# EAGLE board sensor_board_v0.56_b (EAGLE 8.2.2)
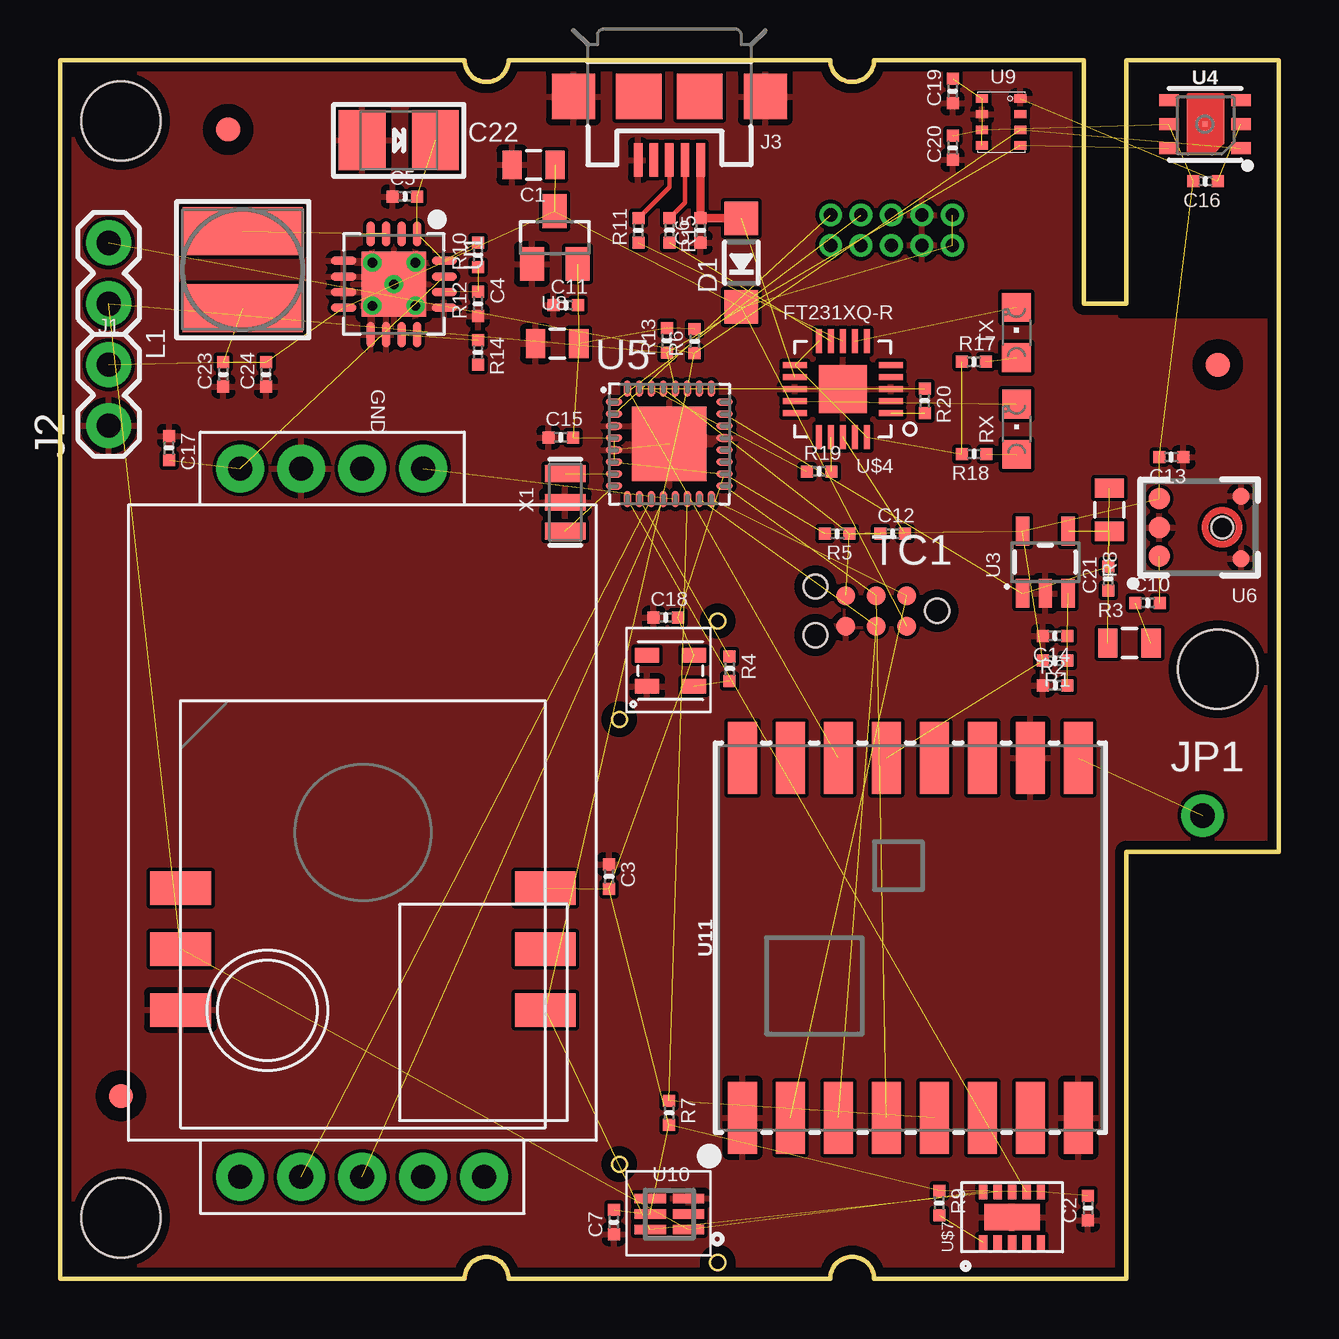
[diagram p0: board, top side]
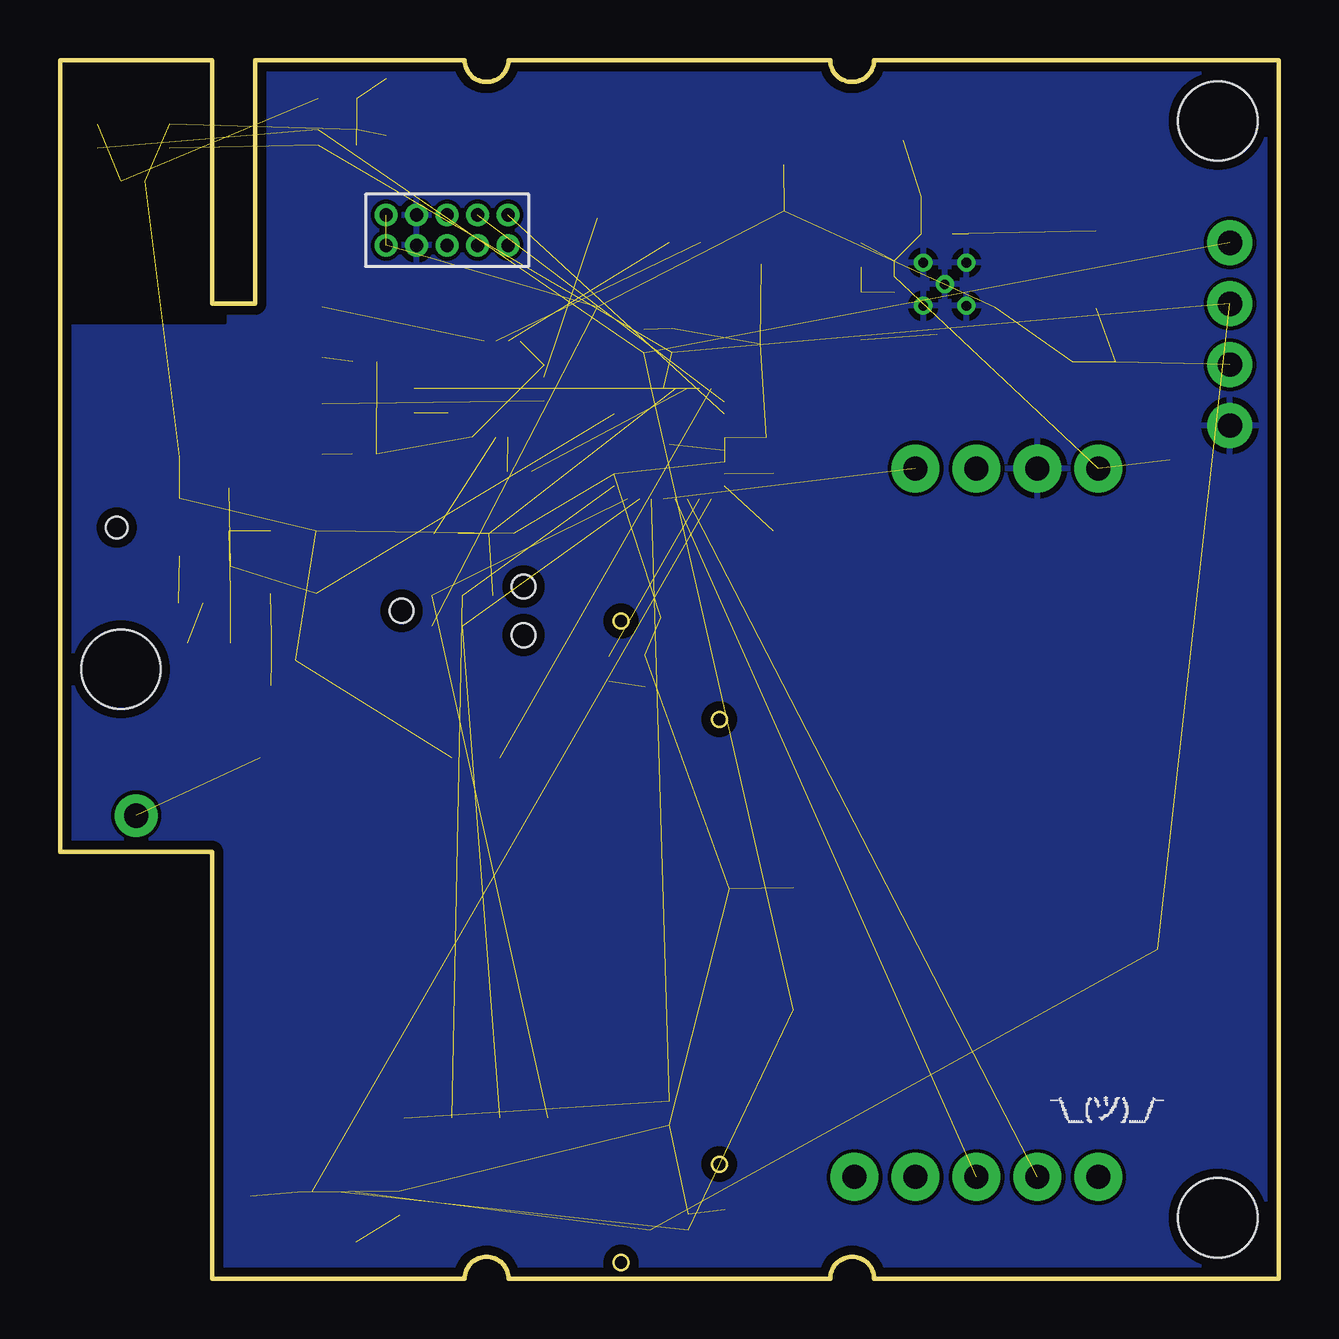
[diagram p1: board, bottom side, seen from below]

Size 50.8 x 50.8 mm. Coordinates in mm from the lower left corner, seen from the top.
Outline: 0,0 16.87,0 arc-90 17.78,0.91 arc-90 18.69,0 32.11,0 arc-90 33.02,0.91 arc-90 33.93,0 44.45,0 44.45,17.78 50.8,17.78 50.8,50.8 44.45,50.8 44.45,40.64 42.67,40.64 42.67,50.8 33.93,50.8 arc-90 33.02,49.89 arc-90 32.11,50.8 18.69,50.8 arc-90 17.78,49.89 arc-90 16.87,50.8 0,50.8 0,0
Copper layers (1*16): Top 0.0356mm / dielectric 1.5011mm / Bottom 0.0356mm
Design rules "oshpark-2layer": minimum track width 6mil, minimum drill 13mil, track to track 6mil, track to pad 6mil, pad to pad 6mil, via to via 6mil, smd to smd 6mil, copper to edge 15mil, drill to drill 6mil, minimum pad ring 7mil, minimum via ring 7mil, stop-mask expansion 2.5mil, vias tented up to drill 0mil, thermal gap 10mil
Net classes: 1 power: width 0.381 mm, clearance 0.254 mm
tRestrict: area 44.2,40.1 to 51.1,51.1
bRestrict: area 43.9,39.9 to 51.3,51.3

## Footprints (pad centres in the part's own frame; a part is rotated, then mirrored left to right if it is on the bottom)
0805 = smd 0.8 x 1.2: 1 -0.9,0; 2 0.9,0
MICROBUILDER__0402MP = smd 0.5 x 0.5: 1 -0.508,0; 2 0.508,0
EIA3528-21/B-R = smd 1.95 x 2.5: + 1.525,0; - -1.525,0
MICROBUILDER_SOD-123 = smd 1.4 x 1.4: A 1.85,0; C -1.85,0
STAND-OFF = hole 3.302: 0,0
1X02 = drill 1.016 pad 1.88: 1 0,0; 2 2.54,0
USB-MICROB = smd 0.35 x 1.4: D+ 0,2.65; D- -0.65,2.65; GND 1.3,2.65; ID 0.65,2.65; VBUS -1.3,2.65 | smd 1.8 x 1.9: MT1 -4,0; MT2 4,0 | smd 1.9 x 1.9: P$1 -1.27,0; P$2 1.27,0
1X01-CLEANBIG = drill 1.016 pad 1.778: 1 0,0
INDUCTOR_5X5MM_TDK_VLC5045 = smd 2 x 5: P$1 -1.6,0; P$2 1.6,0
CHIPLED_0805 = smd 1.2 x 1.2: A 0,-1.05; C 0,1.05
TC2030-IDC-NL = smd 0.787 x 0.787: 1 -1.27,-0.635; 2 -1.27,0.635; 3 0,-0.635; 4 0,0.635; 5 1.27,-0.635; 6 1.27,0.635 | hole 0.991: -2.54,0; 2.54,1.016; 2.54,-1.016
PVQFN-16 = smd 1.05 x 0.35: 1 -2.1,0.975; 2 -2.1,0.325; 3 -2.1,-0.325; 4 -2.1,-0.975; 9 2.1,-0.975; 10 2.1,-0.325; 11 2.1,0.325; 12 2.1,0.975 | smd 0.35 x 1.05: 5 -0.975,-2.1; 6 -0.325,-2.1; 7 0.325,-2.1; 8 0.975,-2.1; 13 0.975,2.1; 14 0.325,2.1; 15 -0.325,2.1; 16 -0.975,2.1 | drill 0.4: P$18 0,0; P$19 -0.9,0.9; P$20 0.9,0.9; P$21 0.9,-0.9; P$22 -0.9,-0.9 | smd 2.7 x 2.7: THERMAL 0,0
SOT23-5 = smd 0.55 x 1.2: 1 -0.95,-1.3; 2 0,-1.3; 3 0.95,-1.3; 4 0.95,1.3; 5 -0.95,1.3
DFN-6-3X3-SI7021 = smd 0.2 x 0.2: 7 0,0 | smd 0.8 x 0.5: DATA 1.5,-1; GND 1.5,0; NC@3 1.5,1; NC@4 -1.5,1; SCK -1.5,-1; VDD -1.5,0
QFN50P500X500X100-33N = smd 0.7 x 0.3: 1 -2.3,1.75; 2 -2.3,1.25; 3 -2.3,0.75; 4 -2.3,0.25; 5 -2.3,-0.25; 6 -2.3,-0.75; 7 -2.3,-1.25; 8 -2.3,-1.75; 17 2.3,-1.75; 18 2.3,-1.25; 19 2.3,-0.75; 20 2.3,-0.25; 21 2.3,0.25; 22 2.3,0.75; 23 2.3,1.25; 24 2.3,1.75 | smd 0.3 x 0.7: 9 -1.75,-2.3; 10 -1.25,-2.3; 11 -0.75,-2.3; 12 -0.25,-2.3; 13 0.25,-2.3; 14 0.75,-2.3; 15 1.25,-2.3; 16 1.75,-2.3; 25 1.75,2.3; 26 1.25,2.3; 27 0.75,2.3; 28 0.25,2.3; 29 -0.25,2.3; 30 -0.75,2.3; 31 -1.25,2.3; 32 -1.75,2.3 | smd 3.1 x 3.1: 33 0,0
ADMP401 = smd 0.9 x 0.9: 1 -1.2,2.62; 5 1.2,2.62; 6 0,2.62 | smd 0.7 x 0.7: 2 1.3,-0.8; 4 -1.3,-0.8 | hole 0.9: 0,0
RECEPTACLE_1.27MM_2X5 = drill 0.55 pad 0.95: 1 4.865,4.865; 2 6.135,4.865; 3 4.865,6.135; 4 6.135,6.135; 5 4.865,7.405; 6 6.135,7.405; 7 4.865,8.675; 8 6.135,8.675; 9 4.865,9.945; 10 6.135,9.945
SOT23 = smd 1 x 1.4: 1 -0.95,-1.1; 2 0.95,-1.1; 3 0,1.1
BMP280 = smd 0.35 x 0.5: 1 0.975,-0.8; 2 0.325,-0.8; 3 -0.325,-0.8; 4 -0.975,-0.8; 5 -0.975,0.8; 6 -0.325,0.8; 7 0.325,0.8; 8 0.975,0.8
DFN6_TAOS = smd 1.3 x 0.4: 1 -0.8,0.65; 2 -0.8,0; 3 -0.8,-0.65; 4 0.8,-0.65; 5 0.8,0; 6 0.8,0.65
RFM69HCW-XXXS2 = smd 3 x 1.2: 1 -7.5,7; 2 -7.5,5; 3 -7.5,3; 4 -7.5,1; 5 -7.5,-1; 6 -7.5,-3; 7 -7.5,-5; 8 -7.5,-7; 9 7.5,-7; 10 7.5,-5; 11 7.5,-3; 12 7.5,-1; 13 7.5,1; 14 7.5,3; 15 7.5,5; 16 7.5,7
FIDUCIAL_1MM = smd 1 x 1: 1 0,0
FTDI_FT231XQ-R_PACKAGE = smd 0.25 x 1: 3V3OUT 0.968,-2.032; CBUS2 -0.532,-2.032; CBUS3 0.968,1.968; CTS# -1.032,-2.032; DTR# -0.032,1.968; RTS# -0.532,1.968; TXD 0.468,1.968; USBDM 0.468,-2.032; USBDP -0.032,-2.032; VCCIO -1.032,1.968 | smd 1 x 0.25: CBUS0 1.968,0.968; CBUS1 1.968,0.468; DCD# -2.032,-1.032; DSR# -2.032,-0.532; GND_PIN3 -2.032,-0.032; GND_PIN13 1.968,-0.032; RESET# 1.968,-1.032; RI# -2.032,0.468; RXD -2.032,0.968; VCC 1.968,-0.532 | smd 2 x 2: GND_PIN21 -0.032,-0.032
SK6805-2427 = smd 1 x 0.6: DIN 0.375,1.85; DOUT 2.325,0.55; GND 2.325,1.85; VCC 0.375,0.55
MH-Z19 = drill 1 pad 2: AOT 1.515,9.75; GND 1.515,7.21; HD 31.055,14.83; PWM 1.515,12.29; RX 31.055,7.21; SR 31.055,12.29; TX 31.055,9.75; VIN 1.515,4.67; VOUT 31.055,4.67
LGA = smd 0.6 x 0.35: 1 0.3,3.2; 2 0.3,2.6; 3 0.3,2; 4 0.3,1.4; 5 0.3,0.8; 6 2.4,0.8; 7 2.4,1.4; 8 2.4,2; 9 2.4,2.6; 10 2.4,3.2 | smd 1.1 x 2.3: 11 1.35,2
IAQ-CORE-C = smd 2.54 x 1.4: GND 0,4.9; P$3 0,9.98; P$5 15.2,7.44; SCL 0,7.44; SDA 15.2,4.9; VCC 15.2,9.98
RESONATOR-SMD = smd 0.7 x 1.7: 1 -1.2,0; 2 0,0; 3 1.2,0

## Placement (x,y rotation side)
C1  1uF  [0805]  19.74,46.43 180 top
C2  1uF  [MICROBUILDER__0402MP]  42.85,2.95 90 top
C3  0.1uF  [MICROBUILDER__0402MP]  22.89,16.76 270 top
C4  10uF  [0805]  20.73,38.98 180 top
C5  2.2uF  [MICROBUILDER__0402MP]  14.38,45.11 0 top
C6  0.1uF  [MICROBUILDER__0402MP]  26.71,43.7 90 top
C7  0.1uF  [MICROBUILDER__0402MP]  23.09,2.36 90 top
C10  4.7uF  [MICROBUILDER__0402MP]  45.34,28.17 0 top
C11  0.1uF  [MICROBUILDER__0402MP]  21.08,40.58 0 top
C12  0.1uF  [MICROBUILDER__0402MP]  34.71,31.05 0 top
C13  0.1uF  [MICROBUILDER__0402MP]  46.32,34.25 180 top
C14  1uF  [MICROBUILDER__0402MP]  41.48,26.8 180 top
C15  0.1uF  [MICROBUILDER__0402MP]  20.87,35.07 0 top
C16  0.1uF  [MICROBUILDER__0402MP]  47.75,45.75 180 top
C17  0.1uF  [MICROBUILDER__0402MP]  4.55,34.62 270 top
C18  1uF  [MICROBUILDER__0402MP]  25.25,27.56 0 top
C19  0.1uF  [MICROBUILDER__0402MP]  37.21,49.5 90 top
C20  0.1uF  [MICROBUILDER__0402MP]  37.21,47.14 90 top
C21  100pF  [MICROBUILDER__0402MP]  43.69,29.18 90 top
C22  100uF/6V  [EIA3528-21/B-R]  14.12,47.45 0 top
C23  0.1uF  [MICROBUILDER__0402MP]  6.81,37.69 90 top
C24  10uF  [MICROBUILDER__0402MP]  8.59,37.69 90 top
D1  [MICROBUILDER_SOD-123]  28.4,42.35 90 top
H1  STAND-OFF  [STAND-OFF]  2.54,48.26 0 top
H2  STAND-OFF  [STAND-OFF]  2.54,2.54 0 top
H3  STAND-OFF  [STAND-OFF]  48.26,25.4 0 top
J1  [1X02]  2.03,40.64 90 top
J2  [1X02]  2.03,35.56 90 top
J3  USB-MICROB  [USB-MICROB]  25.4,49.28 180 top
JP1  Antenna  [1X01-CLEANBIG]  47.62,19.3 0 top
L1  VLC5045-6.8uH  [INDUCTOR_5X5MM_TDK_VLC5045]  7.62,42.06 90 top
R1  10K  [MICROBUILDER__0402MP]  41.48,25.76 180 top
R2  10K  [MICROBUILDER__0402MP]  41.48,24.74 0 top
R3  1.5K  [0805]  44.58,26.49 0 top
R4  470  [MICROBUILDER__0402MP]  27.91,25.43 270 top
R5  10K  [MICROBUILDER__0402MP]  32.4,31.06 180 top
R6  10K  [MICROBUILDER__0402MP]  26.45,39.08 90 top
R7  10K  [MICROBUILDER__0402MP]  25.4,6.91 270 top
R8  100K  [0805]  43.74,32.05 270 top
R9  100K  [MICROBUILDER__0402MP]  36.65,3.15 270 top
R10  1.87M  [MICROBUILDER__0402MP]  17.42,42.67 90 top
R11  27  [MICROBUILDER__0402MP]  24.11,43.7 90 top
R12  200K  [MICROBUILDER__0402MP]  17.42,40.64 90 top
R13  10K  [MICROBUILDER__0402MP]  25.3,39.1 90 top
R14  340K  [MICROBUILDER__0402MP]  17.42,38.61 270 top
R15  27  [MICROBUILDER__0402MP]  25.41,43.7 270 top
R17  470  [MICROBUILDER__0402MP]  38.09,38.22 0 top
R18  470  [MICROBUILDER__0402MP]  38.1,34.38 180 top
R19  1K  [MICROBUILDER__0402MP]  31.64,33.65 0 top
R20  1K  [MICROBUILDER__0402MP]  36.05,36.59 270 top
RX  [CHIPLED_0805]  39.87,35.41 0 top
TC1  TC2030-IDC-NL  [TC2030-IDC-NL]  34.02,27.84 180 top
TX  [CHIPLED_0805]  39.87,39.44 0 top
U1  TPS61090RSAR  [PVQFN-16]  13.92,41.45 270 top
U3  OPA344  [SOT23-5]  41.07,29.87 0 top
U4  SI7021  [DFN-6-3X3-SI7021]  47.73,48.12 0 top
U5  ATMEGA328P-MU  [QFN50P500X500X100-33N]  25.4,34.8 0 top
U6  ADMP401  [ADMP401]  48.44,31.32 90 top
U7  PMS7003  [RECEPTACLE_1.27MM_2X5]  42.07,49.21 270 bottom
U8  MCP1703CB  [SOT23]  20.62,43.4 0 top
U9  BMP280  [BMP280]  39.23,48.22 90 top
U10  TSL2591  [DFN6_TAOS]  25.4,2.69 180 top
U11  915MHz  [RFM69HCW-XXXS2]  35.45,14.21 90 top
U$1  FIDUCIAL  [FIDUCIAL_1MM]  7.01,47.9 0 top
U$2  FIDUCIAL  [FIDUCIAL_1MM]  2.54,7.62 0 top
U$3  FIDUCIAL  [FIDUCIAL_1MM]  48.26,38.1 0 top
U$4  FT231XQ-R  [FTDI_FT231XQ-R_PACKAGE]  32.59,37.04 180 top
U$5  NEOPIXEL_NANO_2427  [SK6805-2427]  26.8,26.54 180 top
U$6  MH-Z19  [MH-Z19]  2.85,35.29 270 top
U$7  CCS811-I2C  [LGA]  41.69,1.22 90 top
U$8  IAQ-CORE-C  [IAQ-CORE-C]  5.03,6.3 0 top
U$9  VLP-450-F  [VLP-450-F]  23.32,23.32 0 top
U$12  VLP-450-F  [VLP-450-F]  23.32,4.78 270 top
X1  16 MHz  [RESONATOR-SMD]  21.06,32.36 270 top

## Library data of the parts
C1 = SparkFun-Capacitors; MPN: CC0805ZRY5V8BB105
C2 C3 C5-C7 C10-C21 C23 C24 D1 R1 R2 R4-R7 R9-R15 R17-R20 = Adafruit Feather 32u4 Bluefruit LE
C4 = SparkFun-Capacitors; MPN: CC0805KKX5R6BB106
C22 L1 U1 = microbuilder
H1-H3 = SparkFun-Electromechanical
J1 J2 = SparkFun-Connectors
J3 = SparkFun-Connectors; MPN: 47346-0001; PROD_ID: CONN-09505
JP1 U$1-U$3 = adafruit
R3 = SparkFun-Passives; MPN: RC0805FR-071K5L
R8 = SparkFun-Passives; MPN: RC0805FR-07100KL
RX TX = adafruit; MPN: LG R971-KN-1; OC_NEWARK: unknown
TC1 = TagConnect
U3 = SparkFun-AnalogIC; MPN: OPA344NA/3K; PROD_ID: IC-08251
U4 = SparkFun-Sensors; PROD_ID: IC-13093
U5 = ATMEGA328P-MU; AVAILABILITY: Good; DESCRIPTION: ATmega Series 20 MHz 32 KB Flash 2 KB SRAM 8-Bit Microcontroller - QFN-32; MF: Atmel; MP: ATMEGA328P-MU; PACKAGE: QFN-32 Atmel; PRICE: 2.55 USD
U6 = SparkFun-Sensors; MPN: INMP401ACEZ-R7; PROD_ID: IC-09773
U7 = Amphenol
U8 = linear; MPN: MCP1703T-2502E/CB; OC_NEWARK: 18T9177
U9 = bosch-bmp280; MPN: BMP280
U10 = TSL2591; MPN: TSL25911FN
U11 = SparkFun-RF; PROD_ID: IC-11997
U$4 = ftdi_ft231xq-r
U$5 = NeoPixel Nano 2427
U$6 = MH-z19; MPN: MH-z19
U$7 = CCS811
U$8 = IAQ-Core
U$9 U$12 = VLP-450-F
X1 = SparkFun

## Nets
5V: C5.2 C17.2 C22.+ R10.2 U1.1 U1.15 U1.16 U$6.VIN
A0: C21.2 R8.1 U3.1 U5.23
A1: U5.24
A2: U5.25
A3: U5.26
A6: U5.19
A7: U5.22
ANT: JP1.1 U11.9
D2: U5.32 U11.14
D3: U5.1 U7.7
D4: U5.2 U7.9
D5: U5.9 U$7.7
D6: R4.1 U5.10
D7: U5.11 U$6.RX
D8: U5.12 U$6.TX
D9: U5.13 U$6.PWM
DTR: C12.2 U$4.DTR#
ENABLE: R14.1 U1.11
FTDI_VCC: R17.1 R18.2 U$4.3V3OUT U$4.RESET# U$4.VCCIO
GND: C1.2 C2.1 C3.1 C4.2 C5.1 C6.1 C7.1 C11.1 C13.1 C14.2 C15.1 C16.1 C17.1 C18.1 C19.1 C20.1 C22.- C23.1 C24.1 J2.1 J3.GND J3.MT1 J3.MT2 R2.1 R12.1 TC1.6 U1.5 U1.6 U1.7 U1.9 U1.10 U1.13 U1.P$18 U1.P$19 U1.P$20 U1.P$21 U1.P$22 U1.THERMAL U3.2 U4.GND U5.3 U5.5 U5.21 U5.33 U6.2 U6.4 U6.6 U7.3 U7.4 U8.1 U9.1 U9.7 U10.3 U11.1 U11.8 U11.10 U$4.GND_PIN3 U$4.GND_PIN13 U$4.GND_PIN21 U$5.GND U$6.GND U$7.11 U$8.GND X1.2
MISO: TC1.1 U5.16 U11.2
MOSI: TC1.4 U5.15 U11.3
N$1: R4.2 U$5.DIN
N$2: R20.2 U$4.RXD
N$3: R19.2 U$4.TXD
N$4: U5.8 X1.3
N$5: U5.7 X1.1
N$6: L1.P$2 U1.3 U1.4
N$9: C10.1 R3.2
N$10: C21.1 R3.1 R8.2 U3.4
N$11: C14.1 R1.1 R2.2 U3.3
N$12: R10.1 R12.2 U1.14
N$13: R9.2 U$7.1
N$17: RX.C U$4.CBUS1
N$18: TX.C U$4.CBUS2
N$25: R15.2 U$4.USBDM
N$26: R11.1 U$4.USBDP
N$27: R18.1 RX.A
N$29: R17.2 TX.A
N$32: J3.D- R15.1
N$33: J3.D+ R11.2
OUT: C10.2 U6.1
PWR: C1.1 C23.2 C24.2 D1.C J2.2 L1.P$1 TC1.2 U1.8 U7.1 U7.2 U8.3
RESET: C12.1 R5.1 TC1.5 U5.29
RX: R19.1 U5.30
SCK: TC1.3 U5.17 U11.4
SCL: J1.1 R13.1 U4.SCK U5.28 U9.4 U10.1 U$7.10 U$8.SCL
SDA: J1.2 R6.1 U4.DATA U5.27 U9.3 U10.6 U$7.9 U$8.SDA
SS: R7.1 U5.14 U11.5
TX: R20.1 U5.31
VBAT: R14.2
VBUS: C6.2 D1.A J3.VBUS U$4.VCC
VCC: C2.2 C3.2 C4.1 C7.2 C11.2 C13.2 C15.2 C16.2 C18.2 C19.2 C20.2 R1.2 R5.2 R6.2 R7.2 R9.1 R13.2 U3.5 U4.VDD U5.4 U5.6 U5.18 U6.5 U8.2 U9.5 U9.6 U9.8 U10.5 U11.13 U$5.VCC U$7.6 U$8.VCC

## Tracks (layer width: path | path; a pad name or v marks a point on that pad's centre or on a via)
5V  (7 unrouted)
A0  (3 unrouted)
ANT  (1 unrouted)
D2  (1 unrouted)
D3  (1 unrouted)
D4  (1 unrouted)
D5  (1 unrouted)
D6  (1 unrouted)
D7  (1 unrouted)
D8  (1 unrouted)
D9  (1 unrouted)
DTR  (1 unrouted)
ENABLE  (1 unrouted)
FTDI_VCC  (4 unrouted)
GND  (3 unrouted)
  pour Top: -0.51,51.31 51.31,51.31 51.31,-0.51 -0.51,-0.51
  pour Bottom: -1.02,51.82 51.82,51.82 51.82,-1.02 -1.02,-1.02
MISO  (2 unrouted)
MOSI  (2 unrouted)
N$1  (1 unrouted)
N$2  (1 unrouted)
N$3  (1 unrouted)
N$4  (1 unrouted)
N$5  (1 unrouted)
N$6  (2 unrouted)
N$9  (1 unrouted)
N$10  (3 unrouted)
N$11  (3 unrouted)
N$12  (2 unrouted)
N$13  (1 unrouted)
N$17  (1 unrouted)
N$18  (1 unrouted)
N$25  (1 unrouted)
N$26  (1 unrouted)
N$27  (1 unrouted)
N$29  (1 unrouted)
N$32
  Top 0.178: J3.D- 26.05,44.85 R15.1
N$33
  Top 0.178: J3.D+ 25.4,45.5 R11.2
OUT  (1 unrouted)
PWR  (10 unrouted)
RESET  (3 unrouted)
RX  (1 unrouted)
SCK  (2 unrouted)
SCL  (7 unrouted)
SDA  (7 unrouted)
SS  (2 unrouted)
TX  (1 unrouted)
VBUS  (1 unrouted)
  Top 0.356: J3.VBUS C6.2 D1.A
VCC  (31 unrouted)

## Text on the board
_tsilk: GND
_bsilk: Touchstone | v0.56 | June 2017 | crtlabs.org | Designed by Akram Ali